# Altium PCB WirelessCommunications.PcbDoc
Units mil, origin at the board's own origin, x right, y up, seen from the top; angles counter-clockwise.
Board outline 6000 x 6000 mil, 2 copper layers (Top Layer, Bottom Layer); 14 components, 30 nets, 99 pads, 10 vias.
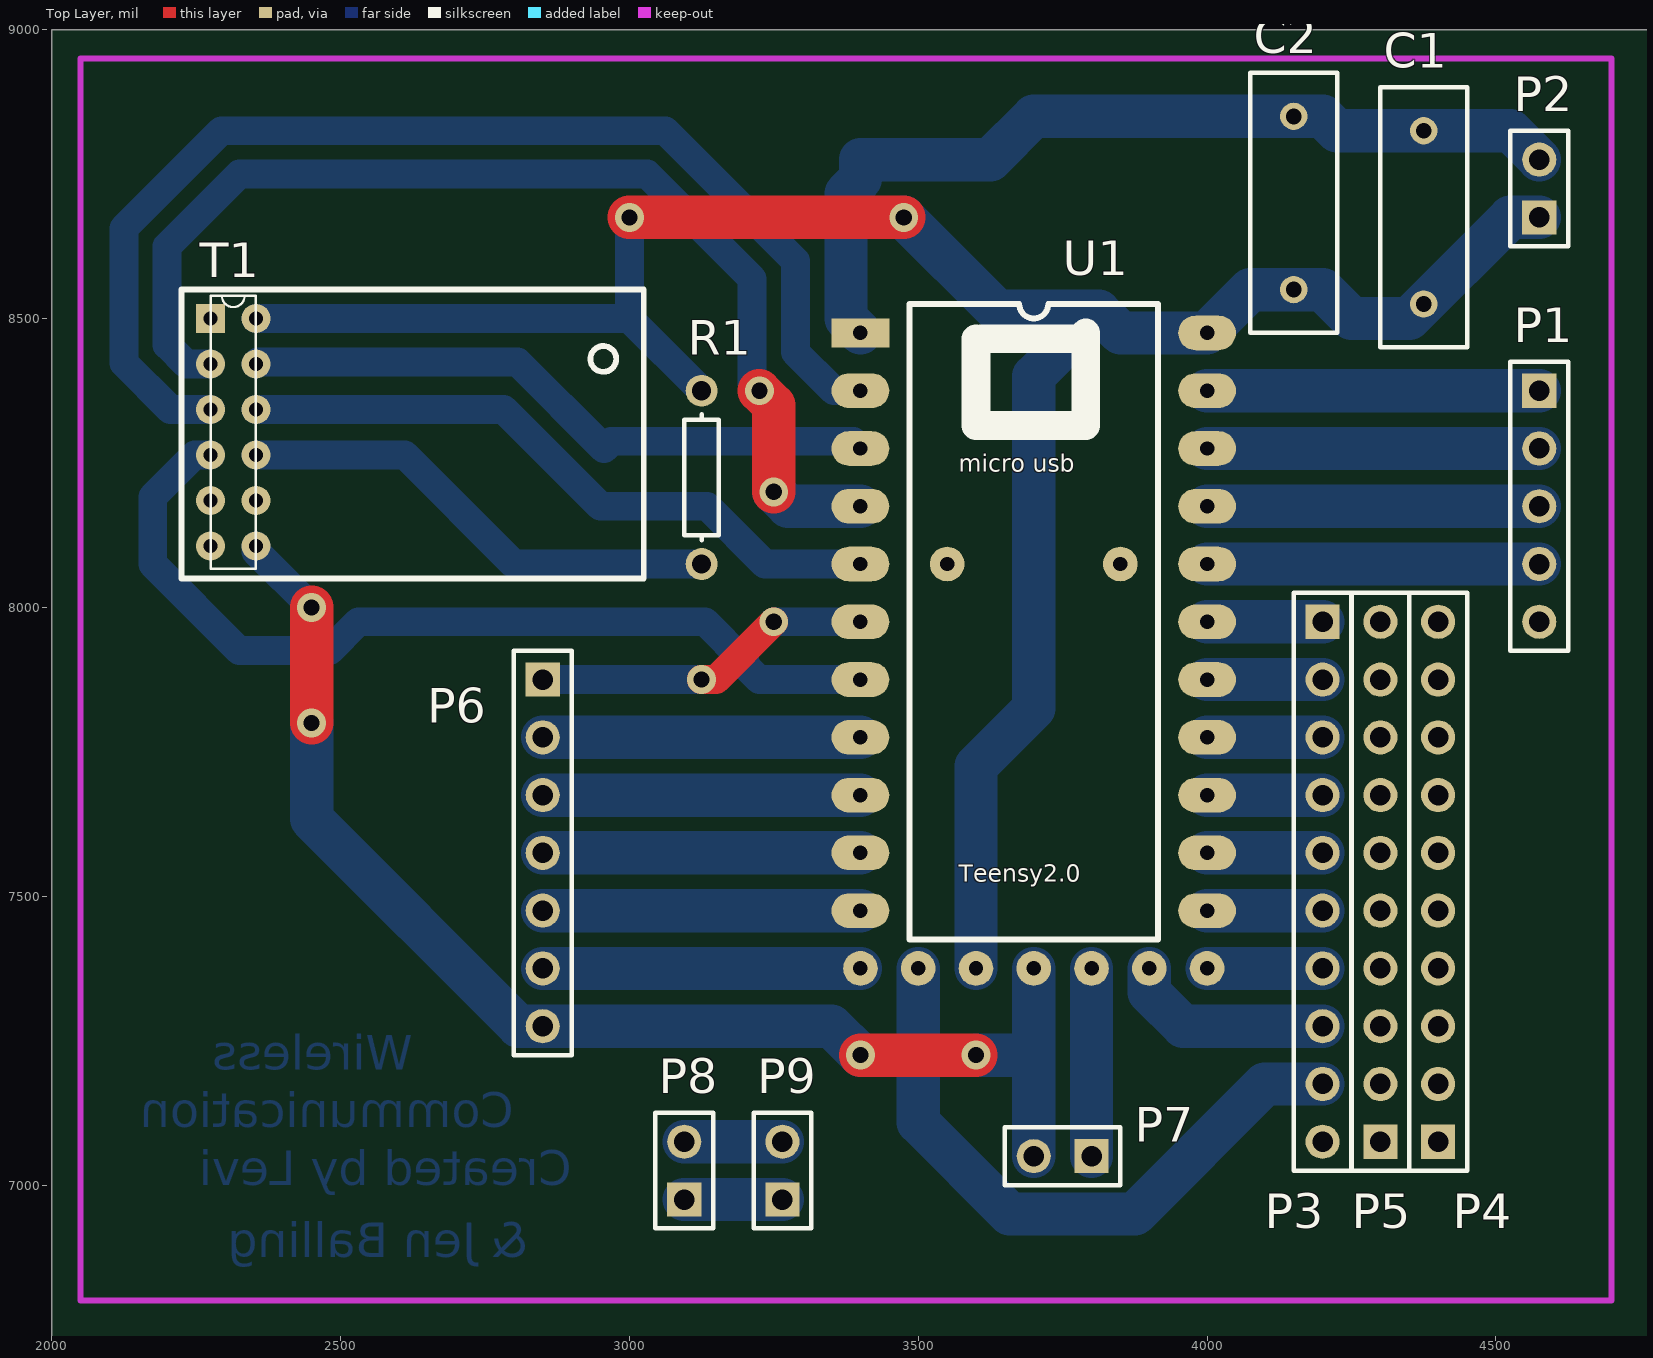
[diagram p0: Top Layer view]
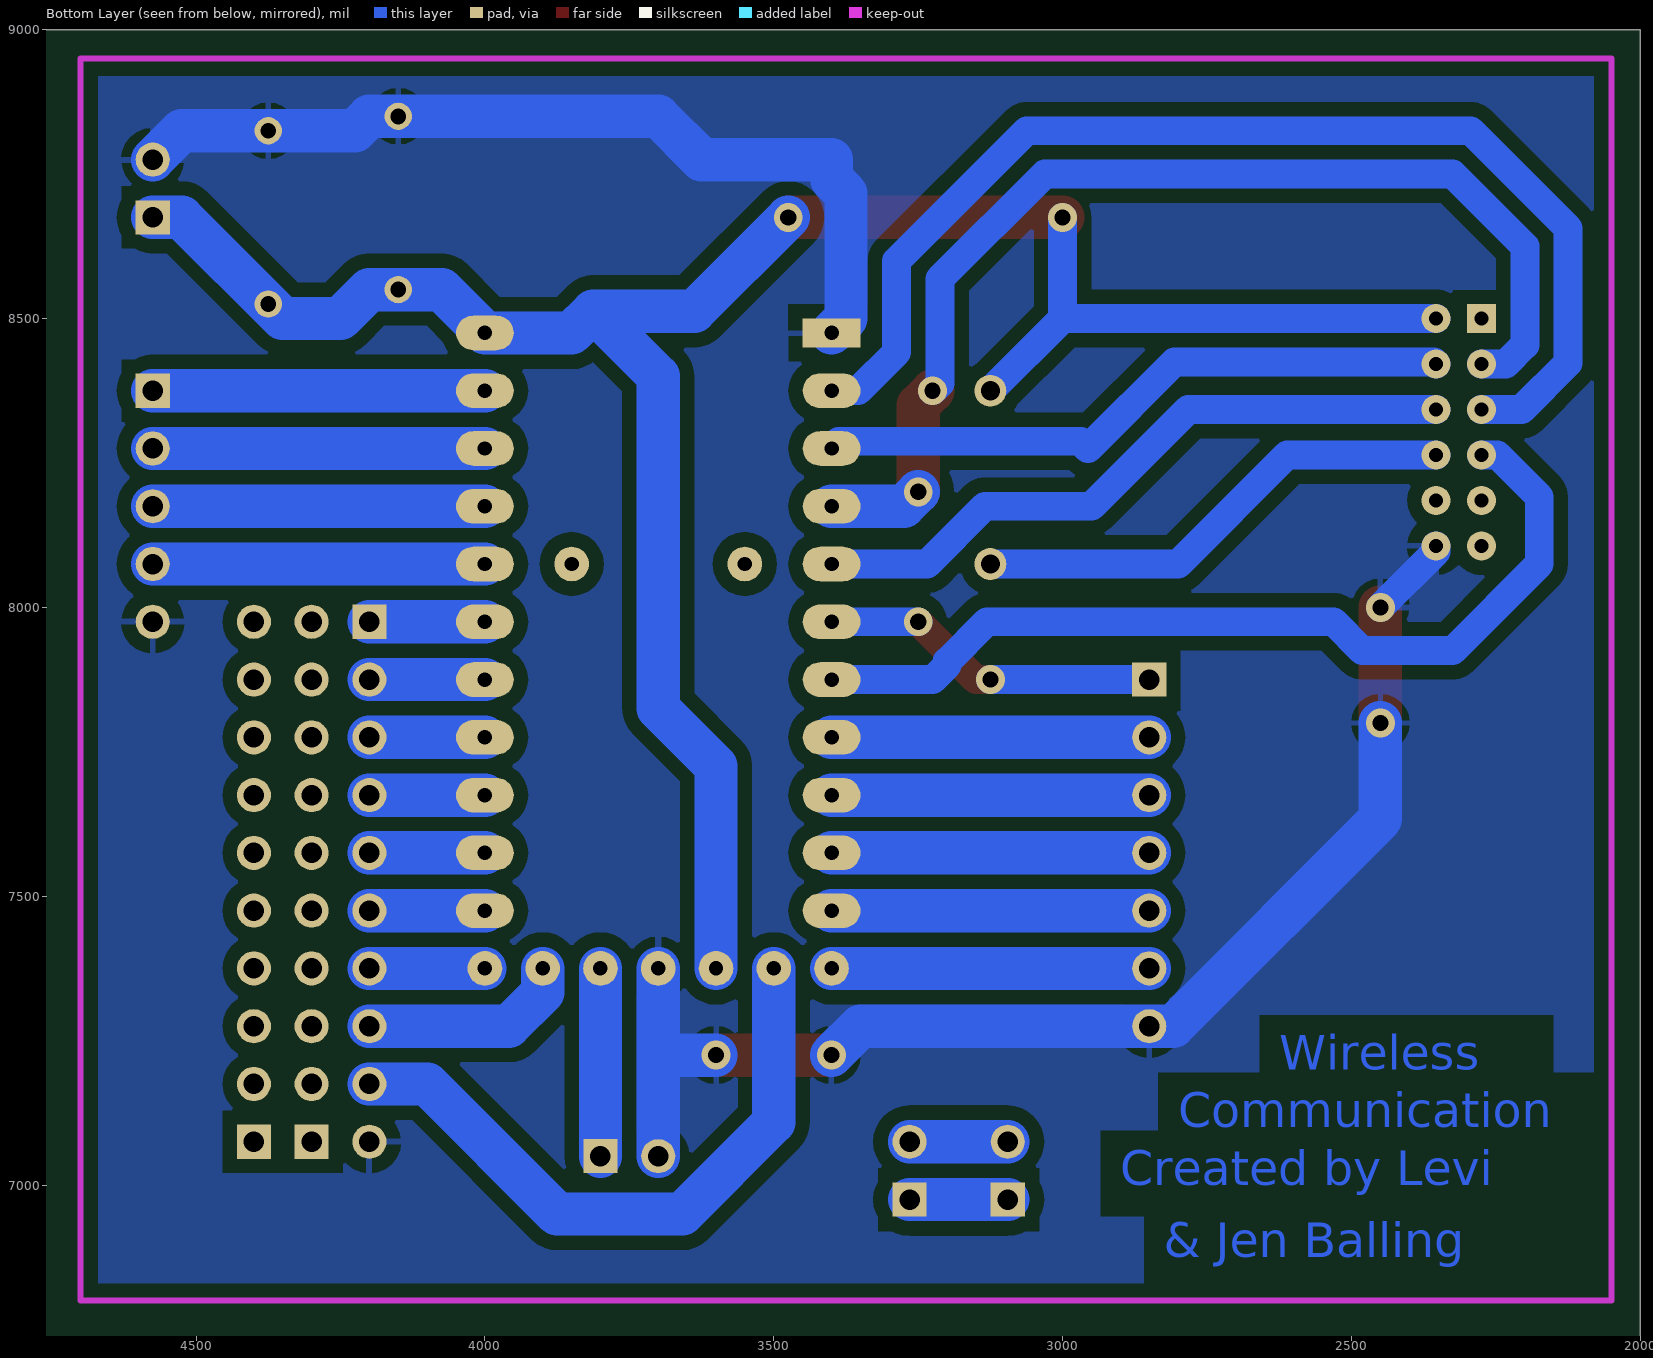
[diagram p1: Bottom Layer view, seen from below]

## Layer stack, top to bottom
Top Layer: signal copper 1.4
Dielectric: dielectric 12.6, FR-4, Dk 4.8
Bottom Layer: signal copper 1.4

## Board outline
2000,3000 8000,3000 8000,9000 2000,9000

## Design rules (kind name [scope] priority, off if disabled: settings)
Clearance [All] p1: gap=25
PolygonConnect [All] p1: connectstyle=Relief reliefconductorwidth=10 reliefentries=4 polygonreliefangle="90 Angle"
RoomDefinition WirelessCommunications [InComponentClass('WirelessCommunications')] p1: confinementstyle=ConfineIn formatcopy=TRUE lockcomponents=FALSE outline 4700,8950 5575,8950 5575,7125 4700,7125
RoutingVias [All] p1: holewidth=32 width=62 viastyle="Through Hole" minholewidth=28 minwidth=50 maxholewidth=28 maxwidth=50
SilkscreenOverComponentPads [All] p1: minsilkscreentomaskgap=10
SolderMaskExpansion [All] p1: expansion=4
Width [All] p1: maxlimit=150 minlimit=25 preferedwidth=50 minimp=50.000000 maximp=50.000000 favimp=50.000000
27 further rules are at their usual default settings.

## Components (designator, comment, footprint, x,y, rotation, side; value= is the part's Value field where it differs from the comment)
C1 "Cap" RAD-0.3 4375,8675 r270 top
C2 "Cap" RAD-0.3 4150,8700 r270 top
P1 "Header 5" HDR1X5 4575,8375 r270 top
P2 "Header 2" HDR1X2 4575,8675 r90 top
P3 "Header 10" HDR1X10 4200,7975 r270 top
P4 "Header 10" HDR1X10 4400,7075 r90 top
P5 "Header 10" HDR1X10 4300,7075 r90 top
P6 "Header 7" HDR1X7 2850,7875 r270 top
P7 "Header 2" HDR1X2 3800,7050 r180 top
P8 "Header 2" HDR1X2 3095,6975 r90 top
P9 "Header 2" HDR1X2 3265,6975 r90 top
R1 "Res1" AXIAL-0.3 3125,8225 r270 top
T1 "RFM12 transceiver" RFM12-TRANSCEIVER 2275,8500 r0 top
U1 "Teensy" Teensy2.0 3400,8475 r0 top

## Footprints (in the part's own frame and the unit in brackets; to place one, negate y for a bottom-side part, rotate by r counter-clockwise, add the part's x,y. Pads: shape width x height; smd on the part's side, far side on the other; paste and mask are expansions set on the pad)
AXIAL-0.3 [mm] "Axial Device, Thru-Hole; 2 Leads; 0.3 in Pin Spacing"
  round 1.4 hole 0.85: 1(-3.81,0) 2(3.81,0)
  silkscreen extent -2.77,-0.76 2.77,0.76
HDR1X2 [mm] "Connector; Header; 2 Position"
  rect 1.5x1.5 hole 0.9: 1(0,0)
  round 1.5 hole 0.9: 2(2.54,0)
  silkscreen extent -1.27,-1.27 3.81,1.27
HDR1X5 [mm] "Connector; Header; 5 Position"
  rect 1.5x1.5 hole 0.9: 1(0,0)
  round 1.5 hole 0.9: 2(2.54,0) 3(5.08,0) 4(7.62,0) 5(10.16,0)
  silkscreen extent -1.27,-1.27 11.43,1.27
HDR1X7 [mm] "Connector; Header; 7 Position"
  rect 1.5x1.5 hole 0.9: 1(0,0)
  round 1.5 hole 0.9: 2(2.54,0) 3(5.08,0) 4(7.62,0) 5(10.16,0) 6(12.7,0) 7(15.24,0)
  silkscreen extent -1.27,-1.27 16.51,1.27
HDR1X10 [mm] "Connector; Header; 10 Position"
  rect 1.5x1.5 hole 0.9: 1(0,0)
  round 1.5 hole 0.9: 2(2.54,0) 3(5.08,0) 4(7.62,0) 5(10.16,0) 6(12.7,0) 7(15.24,0) 8(17.78,0) 9(20.32,0) 10(22.86,0)
  silkscreen extent -1.27,-1.27 24.13,1.27
RAD-0.3 [mm] "Radial Cap, Thru-Hole; 2 Leads; 0.3 in Pin Spacing"
  round 1.2 hole 0.7: 1(-3.81,0) 2(3.81,0)
  silkscreen extent -5.71,-1.91 5.71,1.91
RFM12-TRANSCEIVER [mm] "RFM12 433MHZ transceiver from www.futurlec.com"
  rect 1.27x1.27 hole 0.6: 1(0,0)
  round 1.27 hole 0.6: 2(2,0) 3(0,-2) 4(2,-2) 5(0,-4) 6(2,-4) 7(0,-6) 8(2,-6) 9(0,-8) 10(2,-8) 11(0,-10) 12(2,-10)
  silkscreen extent -1.27,-11.43 19.05,1.27
Teensy2.0 [mil] "Regular Teensy 2.0"
  rect 100x50 hole 25: 1(0,0)
  oval 100x60 hole 25: 2(0,-100) 3(0,-200) 4(0,-300) 5(0,-400) 6(0,-500) 7(0,-600) 8(0,-700) 9(0,-800) 10(0,-900) 11(0,-1000) 19(600,-1000) 20(600,-900) 21(600,-800) 22(600,-700) 23(600,-600) 24(600,-500) 25(600,-400) 26(600,-300) 27(600,-200) 28(600,-100) 29(600,0)
  round 60 hole 25: 12(0,-1100) 13(100,-1100) 14(200,-1100) 15(300,-1100) 16(400,-1100) 17(500,-1100) 18(600,-1100) 30(150,-400) 31(450,-400)
  silkscreen extent 85,-1050 515,50

## Part data
C1 C2: "Capacitor"
P1: "Header, 5-Pin"
P2 P7 P8 P9: "Header, 2-Pin"
P3 P4 P5: "Header, 10-Pin"
P6: "Header, 7-Pin"
R1: "Resistor"
T1: "www.futurlec.com 433 MHZ transceiver"
U1: library part Teensy2.0, "The teensy 2.0 from www.PJRC.com, chang clock to 8MHz"

## Via types
v1: diameter 50, hole 28, Top Layer to Bottom Layer, 10 vias

## Nets (pads, with @x,y where several pads share a name; then routed paths per layer and width w, separated by ;. In a path a pad name is that pad's centre, name@x,y a point inside that pad or via, vN(x,y) a via of type N, cw(c..) or ccw(c..) an arc to the next point about the centre after c; other vN are vias at no path point)
"CHIP SELECT": T1.5 U1.2 | length 2040.1
  Bottom Layer w50: T1.5 2205.7,8342.52 2125,8423.22 2125,8656.07 2293.93,8825 3062.13,8825 3287.5,8599.63 3287.5,8441.79 3354.29,8375 U1.2
COMPCNTRLDEMUXA: P6.4 U1.10 | length 550
  Bottom Layer w75: P6.4 U1.10
COMPCNTRLDEMUXB: P6.5 U1.11 | length 550
  Bottom Layer w75: P6.5 U1.11
COMPCNTRLDEMUXC: P6.6 U1.12 | length 550
  Bottom Layer w75: P6.6 U1.12
DEMUX_A: P6.1 U1.6 | length 591.4
  Top Layer w50: v1(3125,7875) 3150,7875 v1(3250,7975)
  Bottom Layer w50: P6.1 v1(3125,7875) ; v1(3250,7975) U1.6
DEMUX_B: P6.2 U1.8 | length 550
  Bottom Layer w75: P6.2 U1.8
DEMUX_C: P6.3 U1.9 | length 550
  Bottom Layer w75: P6.3 U1.9
GND: C1.1 C2.1 P1.5 P2.2 P3.10 P6.7 P7.2 T1.12 U1.1 U1.15 | length 3814.7
  Top Layer w75: v1(2450,7800) v1(2450,8000) ; v1(3400,7225) v1(3600,7225)
  Bottom Layer w50: T1.12 2353.74,8096.26 v1(2450,8000)
  Bottom Layer w75: v1(2450,7800) 2450,7633.58 2808.58,7275 P6.7 3350,7275 v1(3400,7225) ; U1.1 3375,8500 3375,8716.42 3400,8741.42 3400,8775 3625,8775 3700,8850 4200,8850 4225,8825 4525,8825 P2.2 ; v1(3600,7225) 3700,7225 ; P7.2 3700,7225 ; U1.15 3700,7225
MISO: T1.6 U1.5 | length 1157.1
  Bottom Layer w50: T1.6 2782.48,8342.52 2950,8175 3134.69,8175 3234.69,8075 U1.5
MOSI: T1.3 U1.4 | length 1943.3
  Top Layer w75: v1(3225,8375) 3250,8350 v1(3250,8200)
  Bottom Layer w50: T1.3 2233.03,8421.26 2200,8454.29 2200,8625 2325,8750 3031.07,8750 3212.5,8568.57 3212.5,8387.5 v1(3225,8375)
  Bottom Layer w75: v1(3250,8200) 3275,8175 U1.4
NetP3_1: P3.1 U1.24 | length 200
  Bottom Layer w75: U1.24 P3.1
NetP3_2: P3.2 U1.23 | length 200
  Bottom Layer w75: U1.23 P3.2
NetP3_3: P3.3 U1.22 | length 200
  Bottom Layer w75: U1.22 P3.3
NetP3_4: P3.4 U1.21 | length 200
  Bottom Layer w75: U1.21 P3.4
NetP3_5: P3.5 U1.20 | length 200
  Bottom Layer w75: U1.20 P3.5
NetP3_6: P3.6 U1.19 | length 200
  Bottom Layer w75: U1.19 P3.6
NetP3_7: P3.7 U1.18 | length 200
  Bottom Layer w75: U1.18 P3.7
NetP3_8: P3.8 U1.17 | length 365.7
  Bottom Layer w75: U1.17 3900,7333.58 3958.58,7275 P3.8
NetP3_9: P3.9 U1.13 | length 1125.3
  Bottom Layer w75: U1.13 3500,7108.58 3658.58,6950 3875,6950 4100,7175 P3.9
NetP7_1: P7.1 U1.16 | length 325
  Bottom Layer w75: P7.1 U1.16
NetP8_1: P8.1 P9.1 | length 170
  Bottom Layer w75: P8.1 P9.1
NetP8_2: P8.2 P9.2 | length 170
  Bottom Layer w75: P8.2 P9.2
NetR1_2: R1.2 T1.8 | length 849.5
  Bottom Layer w50: T1.8 2611.22,8263.78 2800,8075 R1.2
RFINTERRUPT: T1.7 U1.7 | length 1599
  Bottom Layer w50: T1.7 2247.67,8263.78 2175,8191.11 2175,8075 2325,7925 2481.07,7925 2531.07,7975 3131.07,7975 3200,7906.07 3200,7900 3225,7875 U1.7
SPEAKER_DEMUX_A: P1.2 U1.27 | length 575
  Bottom Layer w75: U1.27 P1.2
SPEAKER_DEMUX_B: P1.3 U1.26 | length 575
  Bottom Layer w75: U1.26 P1.3
SPEAKER_DEMUX_C: P1.4 U1.25 | length 575
  Bottom Layer w75: U1.25 P1.4
SPEAKER_DEMUX_EN: P1.1 U1.28 | length 575
  Bottom Layer w75: U1.28 P1.1
SPI_CLOCK: T1.4 U1.3 | length 1120.3
  Bottom Layer w50: T1.4 2357.48,8425 2806.07,8425 2956.07,8275 2968.57,8287.5 3387.5,8287.5 U1.3
VCC: C1.2 C2.2 P2.1 R1.1 T1.2 U1.14 U1.29 | length 4005.7
  Top Layer w75: v1(3000,8675) v1(3475,8675)
  Bottom Layer w50: T1.2 3000,8500 ; v1(3000,8675) 3000,8500 ; R1.1 3000,8500
  Bottom Layer w75: v1(3475,8675) 3637.5,8512.5 3812.5,8512.5 ; U1.14 3600,7725 3700,7825 3700,8400 3812.5,8512.5 ; P2.1 4525,8675 4350,8500 4250,8500 4200,8550 4075,8550 U1.29 3850,8475 3812.5,8512.5
pads on no net: P4.1 P4.2 P4.3 P4.4 P4.5 P4.6 P4.7 P4.8 P4.9 P4.10 P5.1 P5.2 P5.3 P5.4 P5.5 P5.6 P5.7 P5.8 P5.9 P5.10 T1.1 T1.9 T1.10 T1.11 U1.30 U1.31

## Polygon pours and split planes (outlines as drawn)
GND on Bottom Layer "GndPlane" (solid, pour order 4): 2050,8950 2050,6800 4700,6800 4700,8950

## Keep-outs
Keep-Out Layer:
  lines w10: 2050,6800 2050,8950 4700,8950 4700,6800 2050,6800

## Other copper
Bottom Layer:
  text "Wireless" at 2625,7200 h60
  text "Communication" at 2800,7100 h60
  text "Created by Levi" at 2900,7000 h60
  text "& Jen Balling" at 2825,6875 h60

## Silkscreen, mask and mechanical layers (free items; w line width, h text height)
Drill Drawing:
  text ".LEGEND" at 8210,3210 h60
  text "Drill Drawing." at 8200,3100 h60

## Dimensions
2050,6800 to 2050,8950 on Mechanical 1
2050,6800 to 4700,6800 on Mechanical 1

## Text inside footprints (layer, text, board x,y; h text height)
U1: Top Overlay "Teensy2.0" at 3570,7525 h30; Top Overlay "micro usb" at 3570,8235 h30